# EAGLE board teleinfo (EAGLE 6.5.0)
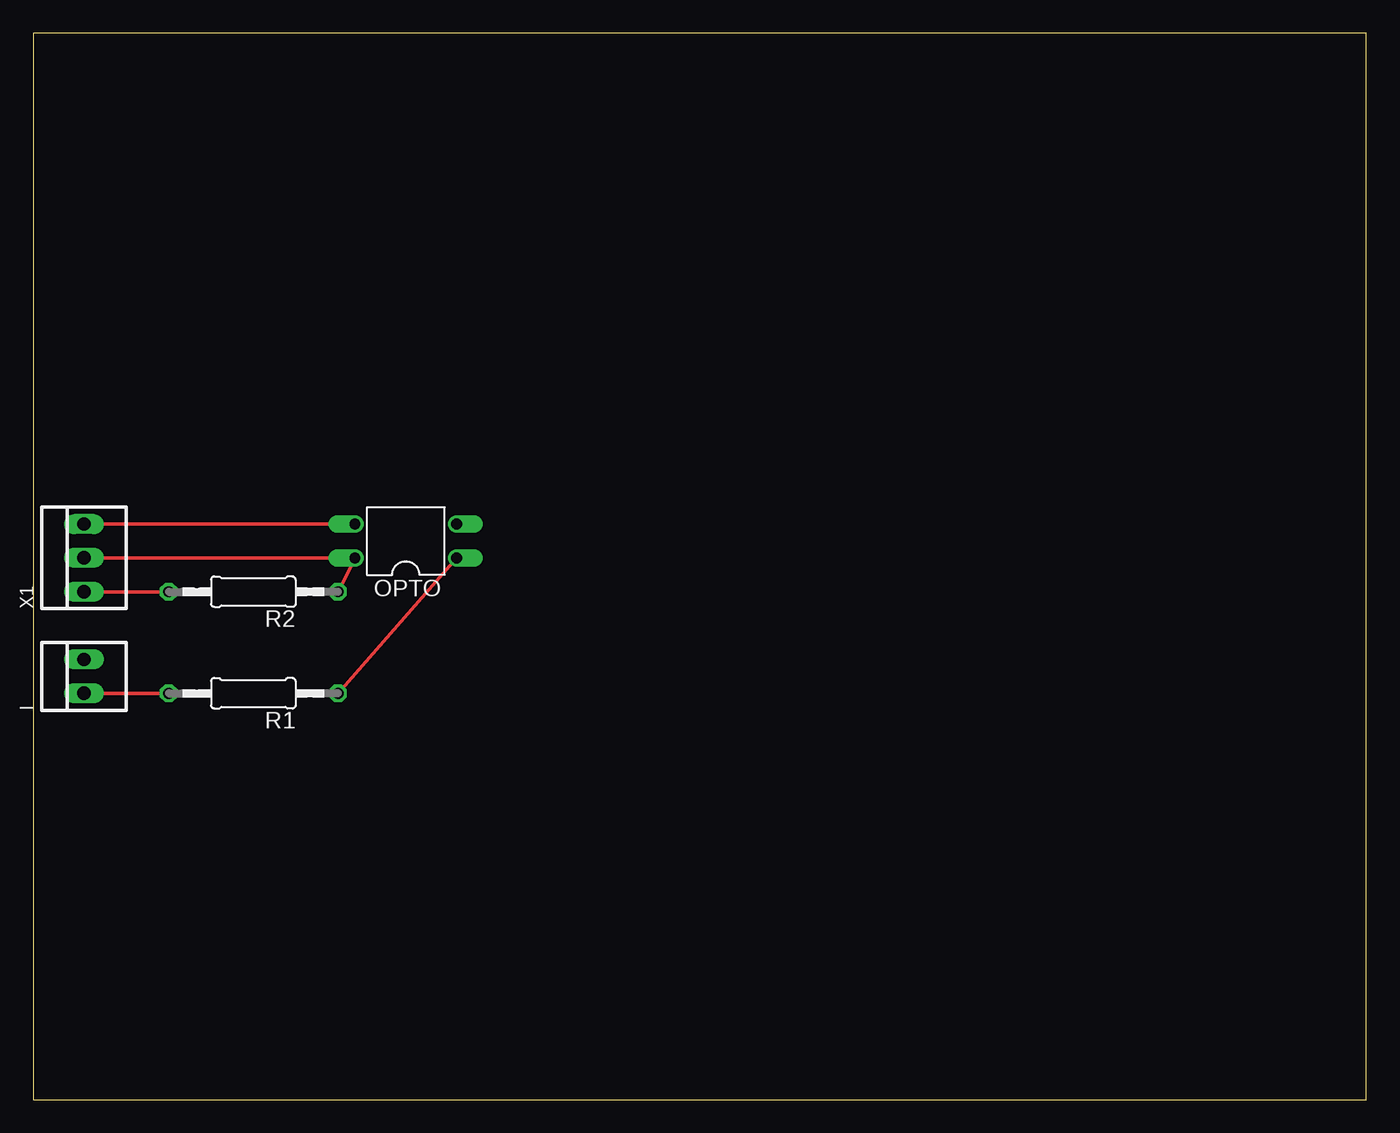
[diagram p0: board, top side]
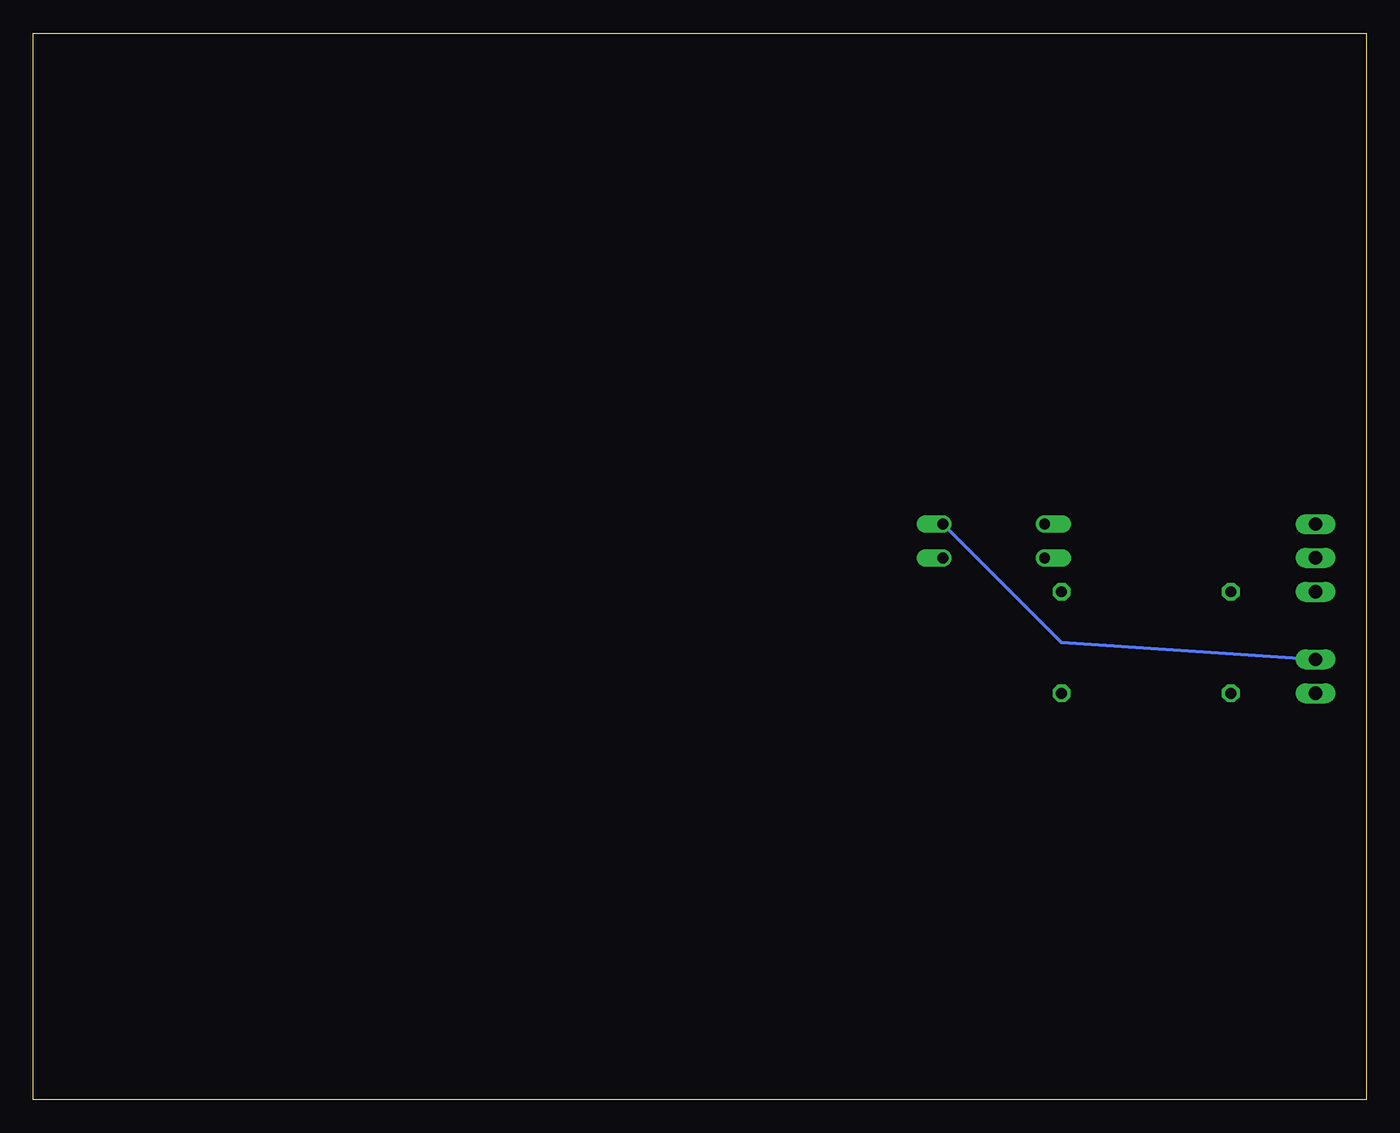
[diagram p1: board, bottom side, seen from below]

Size 100 x 80 mm. Coordinates in mm from the lower left corner, seen from the top.
Outline: 0,0 100,0 100,80 0,80 0,0
Copper layers (1*16): Top 0.035mm / dielectric 1.5mm / Bottom 0.035mm
Design rules "default": minimum track width 10mil, minimum drill 24mil, track to track 8mil, track to pad 8mil, pad to pad 8mil, via to via 8mil, smd to smd 8mil, copper to edge 40mil, drill to drill 8mil, minimum pad ring 10mil, minimum via ring 8mil, stop-mask expansion 4mil, vias tented up to drill 0mil, thermal gap 10mil

## Footprints (pad centres in the part's own frame; a part is rotated, then mirrored left to right if it is on the bottom)
22-23-2021 = drill 1 long: 1 -1.27,0; 2 1.27,0
DIL04 = drill 0.813 offset: 1 -1.27,-3.81; 2 1.27,-3.81; 3 1.27,3.81; 4 -1.27,3.81
0207/12 = drill 0.813 octagon: 1 -6.35,0; 2 6.35,0
22-23-2031 = drill 1 long: 1 -2.54,0; 2 0,0; 3 2.54,0

## Placement (x,y rotation side)
I  [22-23-2021]  3.81,31.75 90 top
OPTO  SFH620A  [DIL04]  27.94,41.91 90 top
R1  1.2k  [0207/12]  16.51,30.48 180 top
R2  3.3k  [0207/12]  16.51,38.1 180 top
X1  [22-23-2031]  3.81,40.64 90 top

## Library data of the parts
I = con-molex; MF: MOLEX; MPN: 22-23-2021; OC_FARNELL: 1462926; OC_NEWARK: 25C3832
OPTO = optocoupler; MPN: SFH620A-2; OC_FARNELL: 1469594; OC_NEWARK: 97K9546
R1 R2 = resistor
X1 = con-molex; MF: MOLEX; MPN: 22-23-2031; OC_FARNELL: 1462950; OC_NEWARK: 30C0862

## Nets
N$1: OPTO.1 R1.1
N$2: I.1 R1.2
N$3: I.2 OPTO.2
N$4: OPTO.4 R2.1 X1.2
N$5: OPTO.3 X1.3
N$6: R2.2 X1.1

## Tracks (layer width: path | path; a pad name or v marks a point on that pad's centre or on a via)
N$1
  Top 0.254: OPTO.1 R1.1
N$2
  Top 0.254: I.1 R1.2
N$3
  Bottom 0.254: OPTO.2 22.86,34.29 I.2
N$4
  Top 0.254: R2.1 OPTO.4 X1.2
N$5
  Top 0.254: X1.3 OPTO.3
N$6
  Top 0.254: X1.1 R2.2